# EAGLE board main_node (EAGLE 9.6.2)

Size 100 x 80 mm. Coordinates in mm from the lower left corner, seen from the top.
Outline: 0,0 100,0 100,80 0,80 0,0
Copper layers (1*16): Top 0.035mm / dielectric 1.5mm / Bottom 0.035mm
Design rules "default": minimum track width 6mil, minimum drill 0.35mm, track to track 6mil, track to pad 6mil, pad to pad 6mil, via to via 6mil, smd to smd 6mil, copper to edge 40mil, drill to drill 6mil, minimum pad ring 10mil, minimum via ring 8mil, stop-mask expansion 4mil, vias tented up to drill 0mil, thermal gap 10mil
Net classes: 1 gnd: width 0.381 mm, drill 0.381 mm; 2 power: width 0.381 mm, drill 0.381 mm

## Footprints (pad centres in the part's own frame; a part is rotated, then mirrored left to right if it is on the bottom)
ML6 = drill 0.914 octagon: 1 -2.54,-1.27; 2 -2.54,1.27; 3 0,-1.27; 4 0,1.27; 5 2.54,-1.27; 6 2.54,1.27
ML10 = drill 0.914 octagon: 1 -5.08,-1.27; 2 -5.08,1.27; 3 -2.54,-1.27; 4 -2.54,1.27; 5 0,-1.27; 6 0,1.27; 7 2.54,-1.27; 8 2.54,1.27; 9 5.08,-1.27; 10 5.08,1.27
C0805 = smd 1.3 x 1.5: 1 -0.95,0; 2 0.95,0
MA09-2 = drill 1.016 octagon: 1 -10.16,-1.27; 2 -10.16,1.27; 3 -7.62,-1.27; 4 -7.62,1.27; 5 -5.08,-1.27; 6 -5.08,1.27; 7 -2.54,-1.27; 8 -2.54,1.27; 9 0,-1.27; 10 0,1.27; 11 2.54,-1.27; 12 2.54,1.27; 13 5.08,-1.27; 14 5.08,1.27; 15 7.62,-1.27; 16 7.62,1.27; 17 10.16,-1.27; 18 10.16,1.27
MINIMELF = smd 1.4 x 1.8: A 1.7,0; C -1.7,0
ARDUINO2009_2 = drill 1.016 long: 1 33.02,2.54; 2 35.56,2.54; 3 38.1,2.54; 4 40.64,2.54; 5 43.18,2.54; 6 45.72,2.54; 7 50.8,2.54; 8 53.34,2.54; 9 55.88,2.54; 10 58.42,2.54; 11 60.96,2.54; 12 63.5,2.54; 13 63.5,50.8; 14 60.96,50.8; 15 58.42,50.8; 16 55.88,50.8; 17 53.34,50.8; 18 50.8,50.8; 19 48.26,50.8; 20 45.72,50.8; 21 41.656,50.8; 22 39.116,50.8; 23 36.576,50.8; 24 34.036,50.8; 25 31.496,50.8; 26 28.956,50.8; 27 26.416,50.8; 28 23.876,50.8 | hole 3.2: 15.24,50.8; 66.04,35.56; 66.04,7.62
ESP32-WROVER = smd 1.7 x 0.9: CLK 18,1.27; CMD 0,1.27; EN 0,21.59; GND 0,24.13; GND3 18,24.13; GND_2 0,6.35; IO0 18,7.62; IO2 18,6.35; IO4 18,8.89; IO5 18,12.7; IO12 0,7.62; IO13 0,5.08; IO14 0,8.89; IO15 18,5.08; IO18 18,13.97; IO19 18,15.24; IO21 18,17.78; IO22 18,21.59; IO23 18,22.86; IO25 0,12.7; IO26 0,11.43; IO27 0,10.16; IO32 0,15.24; IO33 0,13.97; IO34 0,17.78; IO35 0,16.51; NC0 18,16.51; NC1 18,10.16; NC2 18,11.43; RXD0 18,19.05; SD0 18,2.54; SD1 18,3.81; SD2 0,3.81; SD3 0,2.54; SENSOR_VN 0,19.05; SENSOR_VP 0,20.32; TXD0 18,20.32; VDD33 0,22.86 | smd 4.5 x 4.5: GND2 7.62,16.34
SJ = smd 1.168 x 1.6: 1 -0.762,0; 2 0.762,0
SJ_2 = smd 1.168 x 1.6: 1 -1.524,0; 2 0,0; 3 1.524,0
MA08-1 = drill 1.016 long: 1 -8.89,0; 2 -6.35,0; 3 -3.81,0; 4 -1.27,0; 5 1.27,0; 6 3.81,0; 7 6.35,0; 8 8.89,0
MA04-1 = drill 1.016 long: 1 -3.81,0; 2 -1.27,0; 3 1.27,0; 4 3.81,0
R0805 = smd 1.3 x 1.5: 1 -0.95,0; 2 0.95,0
MA13-2 = drill 1.016 octagon: 1 -15.24,-1.27; 2 -15.24,1.27; 3 -12.7,-1.27; 4 -12.7,1.27; 5 -10.16,-1.27; 6 -10.16,1.27; 7 -7.62,-1.27; 8 -7.62,1.27; 9 -5.08,-1.27; 10 -5.08,1.27; 11 -2.54,-1.27; 12 -2.54,1.27; 13 0,-1.27; 14 0,1.27; 15 2.54,-1.27; 16 2.54,1.27; 17 5.08,-1.27; 18 5.08,1.27; 19 7.62,-1.27; 20 7.62,1.27; 21 10.16,-1.27; 22 10.16,1.27; 23 12.7,-1.27; 24 12.7,1.27; 25 15.24,-1.27; 26 15.24,1.27
MA04-2 = drill 1.016 octagon: 1 -3.81,-1.27; 2 -3.81,1.27; 3 -1.27,-1.27; 4 -1.27,1.27; 5 1.27,-1.27; 6 1.27,1.27; 7 3.81,-1.27; 8 3.81,1.27
W237-8P = drill 1.194 long: 1 -17.78,-0.635; 2 -12.7,-0.635; 3 -7.62,-0.635; 4 -2.54,-0.635; 5 2.54,-0.635; 6 7.62,-0.635; 7 12.7,-0.635; 8 17.78,-0.635

## Placement (x,y rotation side)
BUS1_6A  [ML6]  -43.18,92.71 0 top  (outside the outline)
BUS1_6B  [ML6]  -59.69,92.71 0 top  (outside the outline)
BUS1_10A  [ML10]  -43.18,59.69 0 top  (outside the outline)
BUS1_10B  [ML10]  -64.77,59.69 0 top  (outside the outline)
BUS2_6A  [ML6]  -76.2,92.71 0 top  (outside the outline)
BUS2_6B  [ML6]  -21.59,105.41 0 top  (outside the outline)
BUS2_10A  [ML10]  -86.36,59.69 0 top  (outside the outline)
BUS2_10B  [ML10]  -24.13,92.71 0 top  (outside the outline)
C16  0.1  [C0805]  -34.29,116.84 0 top  (outside the outline)
CAM  [MA09-2]  -76.2,105.41 0 top  (outside the outline)
D1  4148  [MINIMELF]  -74.93,-24.13 0 top  (outside the outline)
IC2  [ARDUINO2009_2]  -99.06,-106.68 0 top  (outside the outline)
IC10  ESP32-WROVER  [ESP32-WROVER]  -31.75,55.88 0 top  (outside the outline)
J_L1  [SJ]  -96.52,-46.99 0 top  (outside the outline)
J_L2  [SJ]  -91.44,-46.99 0 top  (outside the outline)
J_L3  [SJ]  -86.36,-46.99 0 top  (outside the outline)
J_L4  [SJ]  -81.28,-46.99 0 top  (outside the outline)
J_L5  [SJ]  -76.2,-46.99 0 top  (outside the outline)
J_L6  [SJ]  -71.12,-46.99 0 top  (outside the outline)
J_L7  [SJ]  -96.52,-52.07 0 top  (outside the outline)
J_L7B  [SJ]  -96.52,-41.91 0 top  (outside the outline)
J_L8  [SJ]  -91.44,-52.07 0 top  (outside the outline)
J_L8B  [SJ]  -90.17,-41.91 0 top  (outside the outline)
J_R6  [SJ]  -83.82,-41.91 0 top  (outside the outline)
J_R7  [SJ]  -77.47,-41.91 0 top  (outside the outline)
J_R8  [SJ]  -71.12,-41.91 0 top  (outside the outline)
J_VCC  [SJ_2]  -96.52,-31.75 0 top  (outside the outline)
J_VCCOUT  [SJ]  -77.47,-36.83 0 top  (outside the outline)
L  [MA08-1]  -88.9,-16.51 0 top  (outside the outline)
OLED  [MA04-1]  -43.18,115.57 0 top  (outside the outline)
R  [MA08-1]  -88.9,-24.13 0 top  (outside the outline)
R19  [R0805]  -90.17,-31.75 0 top  (outside the outline)
R30  100k  [R0805]  -16.51,116.84 0 top  (outside the outline)
R31  470  [R0805]  -29.21,116.84 0 top  (outside the outline)
R32  [R0805]  -83.82,-31.75 0 top  (outside the outline)
R33  [R0805]  -77.47,-31.75 0 top  (outside the outline)
R34  [R0805]  -71.12,-31.75 0 top  (outside the outline)
R35  [R0805]  -96.52,-36.83 0 top  (outside the outline)
R36  [R0805]  -90.17,-36.83 0 top  (outside the outline)
R37  [R0805]  -83.82,-36.83 0 top  (outside the outline)
R44  100k  [R0805]  -22.86,116.84 0 top  (outside the outline)
RPI  [MA13-2]  -46.99,105.41 0 top  (outside the outline)
SJ2  [SJ_2]  -53.34,114.3 0 top  (outside the outline)
SJ4  [SJ_2]  -59.69,114.3 0 top  (outside the outline)
SJ22  [SJ]  -66.04,114.3 0 top  (outside the outline)
SV24  [MA04-2]  -93.98,105.41 0 top  (outside the outline)
X1  [W237-8P]  -78.74,-5.08 0 top  (outside the outline)

## Library data of the parts
BUS1_6A BUS1_6B BUS1_10A BUS1_10B BUS2_6A BUS2_6B BUS2_10A BUS2_10B = con-harting-ml; OC_FARNELL: unknown; OC_NEWARK: unknown
C16 R30 R31 R44 = rcl
CAM L OLED R RPI SV24 = con-lstb; OC_FARNELL: unknown; OC_NEWARK: unknown
D1 = diode
IC2 = arduino
IC10 = ESP32-Wrover
J_L1-J_L7 J_L7B J_L8 J_L8B J_R6-J_R8 J_VCC J_VCCOUT SJ2 SJ4 SJ22 = jumper
R19 R32-R37 = rcl; SPICEPREFIX: R
X1 = con-wago-508; OC_FARNELL: unknown; OC_NEWARK: unknown

## Nets
+3V3: IC2.2
+5V: IC2.3
+VIN: IC2.6
BUS_INT: J_R8.2
BUS_RESET: J_L8.1
BUS_SCL: J_R7.2
BUS_SDA: J_R6.2
CAM_D0: CAM.16 IC10.IO5
CAM_D1: CAM.15 IC10.IO18
CAM_D2: CAM.14 IC10.IO19
CAM_D3: CAM.13 IC10.IO21
CAM_D4: CAM.12 IC10.SENSOR_VP
CAM_D5: CAM.11 IC10.SENSOR_VN
CAM_D6: CAM.10 IC10.IO34
CAM_D7: CAM.9 IC10.IO35
CAM_HSYNC: CAM.6 IC10.IO23
CAM_PCLK: CAM.7 IC10.IO22
CAM_PWDN: CAM.18
CAM_RESET: CAM.17 IC10.IO32
CAM_SCL: CAM.3 IC10.IO27
CAM_SDA: CAM.4 IC10.IO26
CAM_U3.3: CAM.1
CAM_VSYNC: CAM.5 IC10.IO25
ESP_AEN: C16.2 IC10.EN R30.2 R31.1 SV24.6
ESP_BOOT: CAM.8 IC10.IO0 R44.1 SV24.4
ESP_IO2: IC10.IO2
ESP_IO4: IC10.IO4
ESP_IO12_SCL: IC10.IO12
ESP_IO13_SDA: IC10.IO13
ESP_IO14: IC10.IO14
ESP_IO15: IC10.IO15
ESP_RES: R31.2
ESP_RXD: IC10.RXD0 SV24.7
ESP_SD0: IC10.SD0
ESP_SD1: IC10.SD1
ESP_SDCLK: IC10.CLK
ESP_TXD: IC10.TXD0 SV24.2
ESP_U3.3 [power]: IC10.VDD33 R30.1 R44.2 SV24.8
FON1: BUS1_10A.3 BUS1_10B.3
FON2: BUS2_10A.3 BUS2_10B.3
GND [gnd]: BUS1_6A.6 BUS1_6B.6 BUS1_10A.8 BUS1_10A.10 BUS1_10B.8 BUS1_10B.10 BUS2_6A.6 BUS2_6B.6 BUS2_10A.8 BUS2_10A.10 BUS2_10B.8 BUS2_10B.10 C16.1 IC2.4 IC2.5 IC2.27 IC10.GND IC10.GND2 IC10.GND3 IC10.GND_2 R.1 RPI.6 RPI.9 RPI.20 RPI.25 SJ2.1 SJ4.1 SV24.1 X1.1 X1.2
INT1: BUS1_6A.1 BUS1_6B.1 BUS1_10A.9 BUS1_10B.9 RPI.7
INT2: BUS2_6A.1 BUS2_6B.1 BUS2_10A.9 BUS2_10B.9
LCD_1 [power]: OLED.1 SJ2.2
LCD_2 [power]: OLED.2 SJ4.2
N$1: X1.7 X1.8
N$2: X1.5 X1.6
N$3: X1.4
N$4: X1.3
N$5: J_R6.1 R.6
N$6: J_R7.1 R.7
N$7: IC10.IO33 SJ22.2
N$8: IC2.7
N$9: IC2.8
N$10: IC2.9
N$11: IC2.10
N$12: J_R8.1 R.8
N$13: IC2.11
N$14: IC2.12
N$15: IC2.13
N$16: IC2.14
N$17: IC2.15
N$18: IC2.16
N$19: IC2.17
N$20: IC2.18
N$21: IC2.19
N$22: IC2.20
N$23: IC2.21
N$24: J_L7.2 J_L7B.2 L.7
N$25: J_L6.2 L.6 R19.1
N$26: IC2.22
N$27: J_L8.2 J_L8B.2 L.8
N$28: J_L5.2 L.5 R34.1
N$29: J_L4.2 L.4 R35.1
N$30: J_L2.2 L.2 R37.1
N$31: J_L3.2 L.3 R36.1
N$32: J_L1.2 L.1
N$33: IC2.23
N$34: IC2.24
N$35: IC2.25
N$36: IC2.26
N$37: IC2.28
N$38: IC2.1
OLED_SCL: J_L8B.1
OLED_SDA: J_L7B.1
RESET1: BUS1_6A.5 BUS1_6B.5 BUS1_10A.5 BUS1_10B.5
RESET2: BUS2_6A.5 BUS2_6B.5 BUS2_10A.5 BUS2_10B.5
RPI_11: RPI.11
RPI_12: RPI.12
RPI_13: RPI.13
RPI_14: RPI.14
RPI_15: RPI.15
RPI_16: RPI.16
RPI_18: RPI.18
RPI_CS0: RPI.24
RPI_CS1: RPI.26
RPI_RXD: RPI.10
RPI_TXD: RPI.8
SCL1: BUS1_6A.3 BUS1_6B.3 BUS1_10A.7 BUS1_10B.7 RPI.5 SV24.3
SCL2: BUS2_6A.3 BUS2_6B.3 BUS2_10A.7 BUS2_10B.7 OLED.3
SDA1: BUS1_6A.4 BUS1_6B.4 BUS1_10A.1 BUS1_10B.1 RPI.3 SV24.5
SDA2: BUS2_6A.4 BUS2_6B.4 BUS2_10A.1 BUS2_10B.1 OLED.4
SPI_CLK: RPI.23
SPI_CS: RPI.22 SJ22.1
SPI_CS0: J_L5.1
SPI_CS1: J_L6.1
SPI_MISO: J_L2.1 RPI.21
SPI_MOSI: J_L3.1 RPI.19
SPI_RESET: J_L7.1
SPI_SCK: J_L4.1
U2_BUS: D1.A J_L1.1 R32.1 R33.1
U2RXD: R33.2
U2TXD: D1.C
U3.3 [power]: RPI.1 RPI.17
U5 [power]: R.4 RPI.2 RPI.4
U33_B1 [power]: BUS1_6A.2 BUS1_6B.2 BUS1_10A.2 BUS1_10B.2 BUS2_6A.2
U33_B2 [power]: BUS2_6B.2 BUS2_10A.2 BUS2_10B.2
U33A [power]: J_VCC.3 J_VCCOUT.2 R.2
U33B [power]: J_VCC.1 R.3
U50_B1 [power]: BUS1_10A.4 BUS1_10B.4
U50_B2 [power]: BUS2_10A.4 BUS2_10B.4
U_OLED [power]: SJ2.3 SJ4.3
UBAT [power]: R.5
UBATSW [power]: BUS1_10A.6 BUS1_10B.6 BUS2_10A.6 BUS2_10B.6
UBUS [power]: J_VCCOUT.1
VCC [power]: J_VCC.2 R19.2 R32.2 R34.2 R35.2 R36.2 R37.2

## Tracks (layer width: path | path; a pad name or v marks a point on that pad's centre or on a via)
CAM_D0  (1 unrouted)
CAM_D1  (1 unrouted)
CAM_D2  (1 unrouted)
CAM_D3  (1 unrouted)
CAM_D4  (1 unrouted)
CAM_D5  (1 unrouted)
CAM_D6  (1 unrouted)
CAM_D7  (1 unrouted)
CAM_HSYNC  (1 unrouted)
CAM_PCLK  (1 unrouted)
CAM_RESET  (1 unrouted)
CAM_SCL  (1 unrouted)
CAM_SDA  (1 unrouted)
CAM_VSYNC  (1 unrouted)
ESP_AEN  (4 unrouted)
ESP_BOOT  (3 unrouted)
ESP_RXD  (1 unrouted)
ESP_TXD  (1 unrouted)
ESP_U3.3  (3 unrouted)
FON1  (1 unrouted)
FON2  (1 unrouted)
GND  (29 unrouted)
INT1  (4 unrouted)
INT2  (3 unrouted)
LCD_1  (1 unrouted)
LCD_2  (1 unrouted)
N$1  (1 unrouted)
N$2  (1 unrouted)
N$5  (1 unrouted)
N$6  (1 unrouted)
N$7  (1 unrouted)
N$12  (1 unrouted)
N$24  (2 unrouted)
N$25  (2 unrouted)
N$27  (2 unrouted)
N$28  (2 unrouted)
N$29  (2 unrouted)
N$30  (2 unrouted)
N$31  (2 unrouted)
N$32  (1 unrouted)
RESET1  (3 unrouted)
RESET2  (3 unrouted)
SCL1  (5 unrouted)
SCL2  (4 unrouted)
SDA1  (5 unrouted)
SDA2  (4 unrouted)
SPI_CS  (1 unrouted)
SPI_MISO  (1 unrouted)
SPI_MOSI  (1 unrouted)
U2_BUS  (3 unrouted)
U3.3  (1 unrouted)
U5  (2 unrouted)
U33_B1  (4 unrouted)
U33_B2  (2 unrouted)
U33A  (2 unrouted)
U33B  (1 unrouted)
U50_B1  (1 unrouted)
U50_B2  (1 unrouted)
U_OLED  (1 unrouted)
UBATSW  (3 unrouted)
VCC  (6 unrouted)